# Altium PCB sar19-coral-connector.PcbDoc
Units mm, origin at the board's own origin, x right, y up, seen from the top; angles counter-clockwise.
Board outline 20.5 x 10.5 mm, 2 copper layers (Top Layer, Bottom Layer), stack 1.571 mm thick; 7 components, 8 nets, 28 pads, 0 vias.
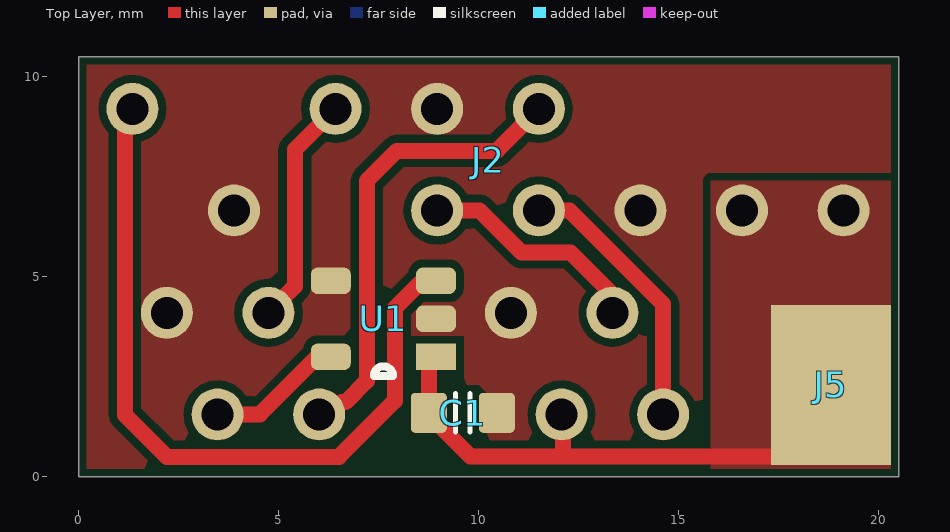
[diagram p0: Top Layer view]
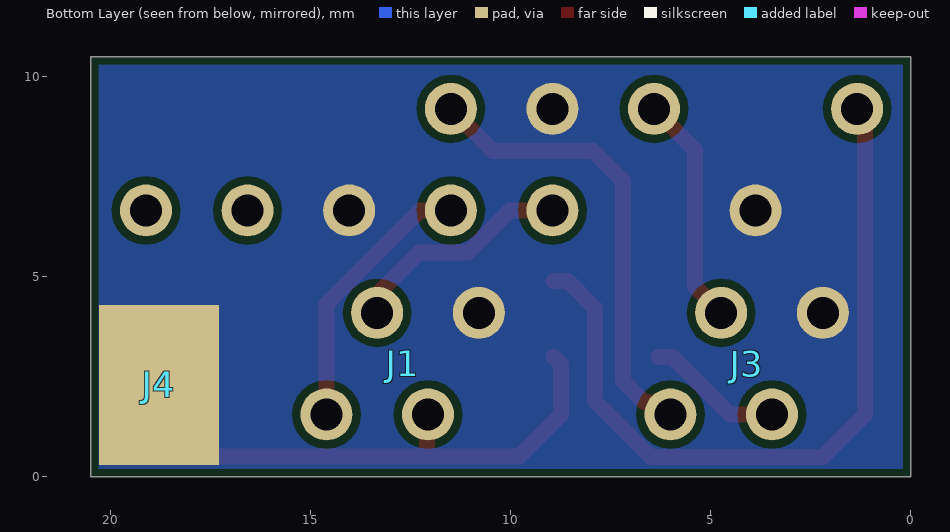
[diagram p1: Bottom Layer view, seen from below]

## Layer stack, top to bottom
Top Solder: solder mask 0.0102, Solder Resist, Dk 3.5
Top Layer: signal copper 0.0356
Dielectric 1: dielectric 1.5, FR-4, Dk 4.8
Bottom Layer: signal copper 0.0356
Bottom Solder: solder mask 0.0102, Solder Resist, Dk 3.5

## Board outline
0,0 20.5,0 20.5,10.5 0,10.5

## Design rules (kind name [scope] priority, off if disabled: settings)
BoardOutlineClearance [All] p1: gap=0.2 ignorepadtopadclearanceinfootprint=FALSE except(0: Arc-SplitContinuation Track-SplitContinuation SMDPad-SplitContinuation THPad-SplitContinuation Via-SplitContinuation Fill-SplitContinuation Poly-SplitContinuation Region-SplitContinuation Text-SplitContinuation)
Clearance [All] p1: gap=0.2 ignorepadtopadclearanceinfootprint=FALSE except(0: Arc-Hole Track-Hole SMDPad-Hole THPad-Hole Via-Hole Fill-Hole Poly-Hole Region-Hole Text-Hole)
ComponentClearance ComponentClearanceIgnore [InComponent('J2')] p1: gap=0 collisioncheckmode=3 verticalgap=0 showdistances=FALSE
ComponentClearance [All] p2: gap=0.254 collisioncheckmode=3 verticalgap=0.2 showdistances=FALSE
HoleSize [All] p1: absolutevalues=TRUE maxlimit=5 minlimit=0.5 maxpercent=80.000 minpercent=20.000
HoleToHoleClearance [All] p1: gap=0.2 allowstackedmicrovias=TRUE
MinimumSolderMaskSliver [All] p1: minsoldermaskwidth=0.2
PlaneClearance [All] p1: clearance=0.5
PlaneConnect [All] p1: planeconnectstyle=Direct reliefexpansion=0.508 reliefentries=4 reliefconductorwidth=0.254 reliefairgap=0.254
PolygonConnect [All] p1: connectstyle=Direct reliefconductorwidth=0.254 reliefentries=4 polygonreliefangle="90 Angle" airgapwidth=0.254
RoomDefinition sar19-coral-connector [InComponentClass('sar19-coral-connector')] p1: confinementstyle=ConfineIn formatcopy=TRUE lockcomponents=FALSE outline -23,-22 78,-22 78,54 -23,54
RoutingVias [All] p1: holewidth=0.711 width=1.27 viastyle="Through Hole" minholewidth=0.711 minwidth=1.27 maxholewidth=0.711 maxwidth=1.27
SilkToSilkClearance [All] p1: silktosilkclearance=0.2
SilkToSolderMaskClearance [IsPad] p1: minsilkscreentomaskgap=0.2 clearancetoexposedcopper=TRUE
SolderMaskExpansion SolderMaskExpansionVia [IsVia] p1: expansion=-5
SolderMaskExpansion [All] p2: expansion=0.102
Width [All] p1: maxlimit=5 minlimit=0.2 preferedwidth=0.3
22 further rules are at their usual default settings.

## Components (designator, comment, footprint, x,y, rotation, side; value= is the part's Value field where it differs from the comment)
C1 "100n" CAPC1608X90N 9.6,1.6 r0 top
J1 "MAINBOARD" MICRO-MATCH-FOB-SIDE-04 10.8,4.1 r180 bottom
J2 "HEADER-2x8-CORAL" PIN-HEADER-2x8-CORAL 19.12,9.2 r180 top
J3 "LIDAR" MICRO-MATCH-FOB-SIDE-04 2.2,4.1 r180 bottom
J4 "GND_IN" POWER-PAD-4x3 18.8,2.3 r90 bottom
J5 "5V_IN" POWER-PAD-4x3 18.8,2.3 r270 top
U1 "UCC27517" SOT23-5 8.93,3 r180 top

## Footprints (in the part's own frame and the unit in brackets; to place one, negate y for a bottom-side part, rotate by r counter-clockwise, add the part's x,y. Pads: shape width x height; smd on the part's side, far side on the other; paste and mask are expansions set on the pad)
CAPC1608X90N [mm] "Chip Capacitor, Body 1.6x0.8mm, EIA 0603, IPC Medium Density"
  round 0.254 on Mech15: 0(0,0)
  rrect25% 0.9x1 smd: 1(-0.85,0) 2(0.85,0)
  Top Layer pour cut-out: -0.6,0.5 -0.4,0.7 0.4,0.7 0.6,0.5 0.6,-0.5 0.4,-0.7 -0.4,-0.7 -0.6,-0.5
  silkscreen extent -0.18,-0.48 0.18,0.48, body extent -0.85,-0.45 0.85,0.45, height 0.89
MICRO-MATCH-FOB-SIDE-04 [mm]
  round 1.3 hole 0.8: 1(0,0) 2(-1.27,-2.54) 3(-2.54,0) 4(-3.81,-2.54)
  body extent -5.41,-3.95 1.6,1.05, height 5.67
PIN-HEADER-2x8-CORAL [mm]
  round 1.3 hole 0.8: 2(0,2.54) 4(2.54,2.54) 6(5.08,2.54) 7(7.62,0) 8(7.62,2.54) 9(10.16,0) 10(10.16,2.54) 11(12.7,0) 14(15.24,2.54) 15(17.78,0)
POWER-PAD-4x3 [mm]
  rect 4x3 smd: 1(0,0)
SOT23-5 [mm]
  rect 1x0.66 smd: 1(0,0)
  rrect50% 1x0.66 smd: 2(0,-0.95) 3(0,-1.9) 4(2.63,-1.9) 5(2.63,0)
  silkscreen extent 1.08,0.24 1.55,0.48, body extent 0.1,-2.47 2.6,0.53, height 1.11

## Part data
C1: library part CAPC_100n_0603_X7R_50V_10%, "Capacitor SMD Cer 100nF 10% 50V X7R 0603", Manufacturer 1="AVX Corporation", Manufacturer 2="TDK Corporation", Manufacturer Part Number 1=06035C104KAT2A, Manufacturer Part Number 2=C1608X7R1H104K, Package / Case="0603 (1608 Metric)", Ratings="50V; X7R", Supplier Part Number 1=478-5052-1-ND, Tolerance=±10%, ComponentLink1Description=http://www.avx.com/docs/Catalogs/cx7r.pdf, ComponentLink1URL=http://www.avx.com/docs/Catalogs/cx7r.pdf, ComponentLink2Description=http://product.tdk.com/capacitor/mlcc/en/documents/mlcc_commercial_general_en.pdf, ComponentLink2URL=http://product.tdk.com/capacitor/mlcc/en/documents/mlcc_commercial_general_en.pdf, Material=ceramic, SCDType=spec, Supplier 1=Digi-Key, Supplier 2=Digi-Key, Supplier Part Number 2=445-1314-1-ND
J1 J3: library part HEADER-4
J4 J5: library part HEADER-1

## Nets (pads, with @x,y where several pads share a name; then routed paths per layer and width w, separated by ;. In a path a pad name is that pad's centre, name@x,y a point inside that pad or via, vN(x,y) a via of type N, cw(c..) or ccw(c..) an arc to the next point about the centre after c; other vN are vias at no path point)
+5: C1.1 J1.2 J2.2 J2.4 J5.1 U1.1 | length 14.1
  Top Layer w0.4: U1.1 8.75,2.82 C1.1 8.75,1.55 9.79,0.51 12.1,0.51 ; J1.2 12.1,1.53 12.1,0.51 ; J5.1 18.8,1.84 17.47,0.51 12.1,0.51
GND: C1.2 J1.1 J2.6 J2.9 J2.14 J3.1 J4.1 U1.2 U1.4
PWM: J3.2 U1.5 | length 3.4
  Top Layer w0.4: J3.2 4.525,1.56 5.965,3 U1.5
PWM_C: J2.15 U1.3 | length 19.1
  Top Layer w0.4: J2.15 1.15,9.01 1.15,1.55 2.2,0.5 6.5,0.5 7.9,1.9 7.9,4.219 8.581,4.9 U1.3
RX_LIDAR: J2.7 J3.4 | length 11.6
  Top Layer w0.4: J3.4 6.254,1.56 6.562,1.869 6.669,1.869 7.2,2.4 7.2,7.4 7.95,8.15 10.45,8.15 J2.7
RX_MAIN: J1.4 J2.8 | length 7
  Top Layer w0.4: J2.8@11.601,6.559 J2.8 12.265,6.66 14.61,4.315 J1.4
TX_LIDAR: J2.11 J3.3 | length 5.8
  Top Layer w0.4: J3.3 5.4,4.76 5.4,8.18 J2.11
TX_MAIN: J1.3 J2.10 | length 5.7
  Top Layer w0.4: J2.10 10.015,6.66 11.065,5.61 12.29,5.61 13.276,4.624 13.276,4.164 J1.3
pads on no net: C1.0

## Polygon pours and split planes (outlines as drawn)
GND on Top Layer "Top Layer-GND" (solid, remove dead copper, pour order 8): 0,0 20.5,0 20.5,10.5 0,10.5
+5 on Top Layer "Bottom Layer-+5" (solid, remove dead copper, pour order 0): 20.5,0 20.5,7.4 15.8,7.4 15.8,0
GND on Bottom Layer "Bottom Layer-GND" (solid, remove dead copper, pour order 4): 0,0 0,10.5 20.5,10.5 20.5,0

## Silkscreen, mask and mechanical layers (free items; w line width, h text height)
Mechanical 1:
  the board outline again, w0.2